# Altium PCB Конвертер USB-RS232 v1.0.PcbDoc
Units mm, origin at the board's own origin, x right, y up, seen from the top; angles counter-clockwise.
Board outline 31.5 x 22 mm, 2 copper layers (Top Layer, Bottom Layer), stack 1.571 mm thick; 26 components, 22 nets, 123 pads, 83 vias.
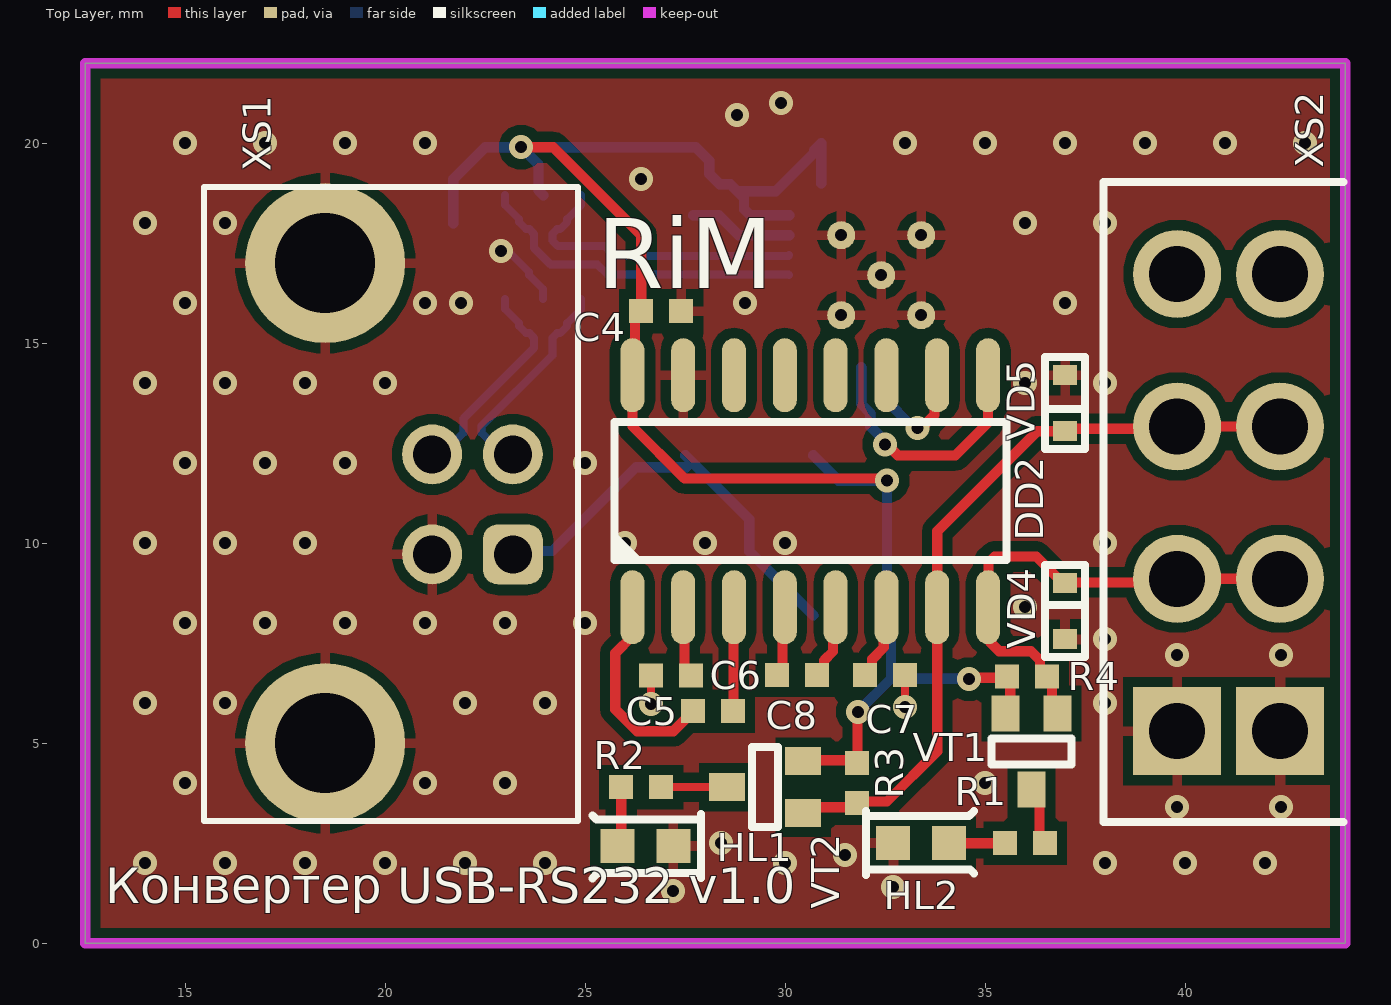
[diagram p0: Top Layer view]
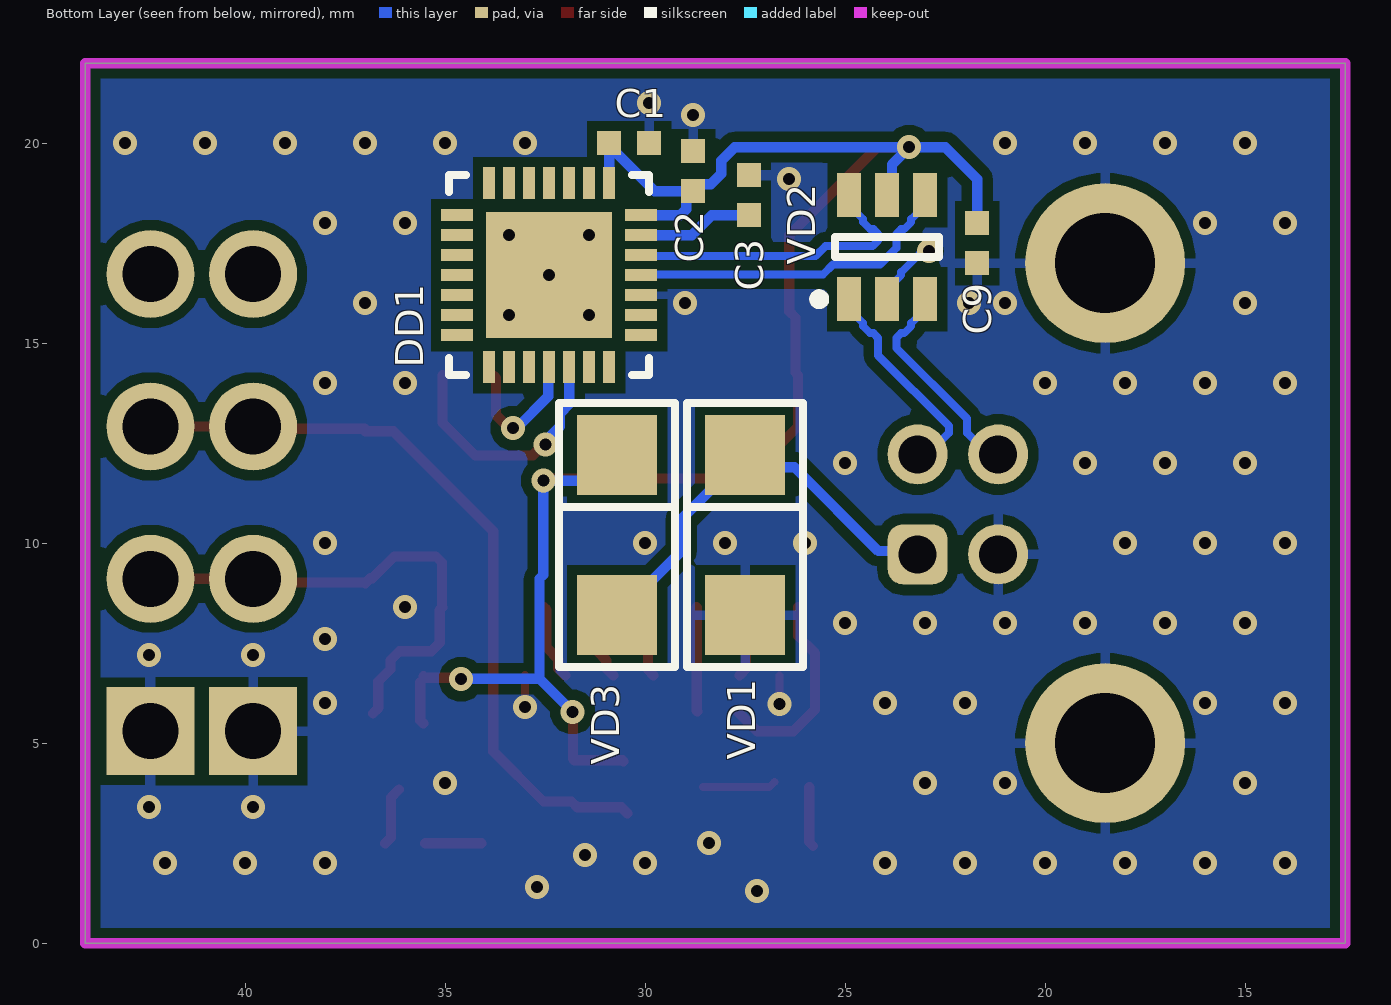
[diagram p1: Bottom Layer view, seen from below]
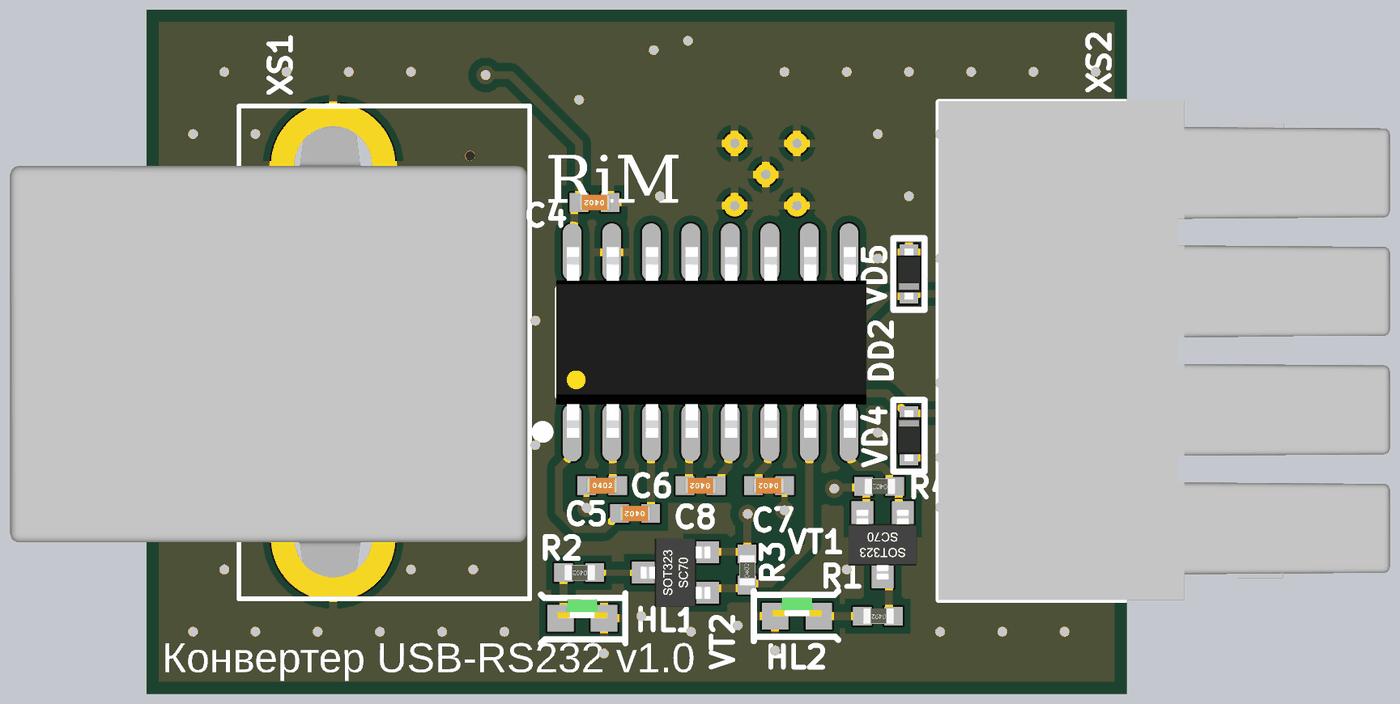
[diagram p2: 3D render of the assembled board from above, using the file's embedded part models]
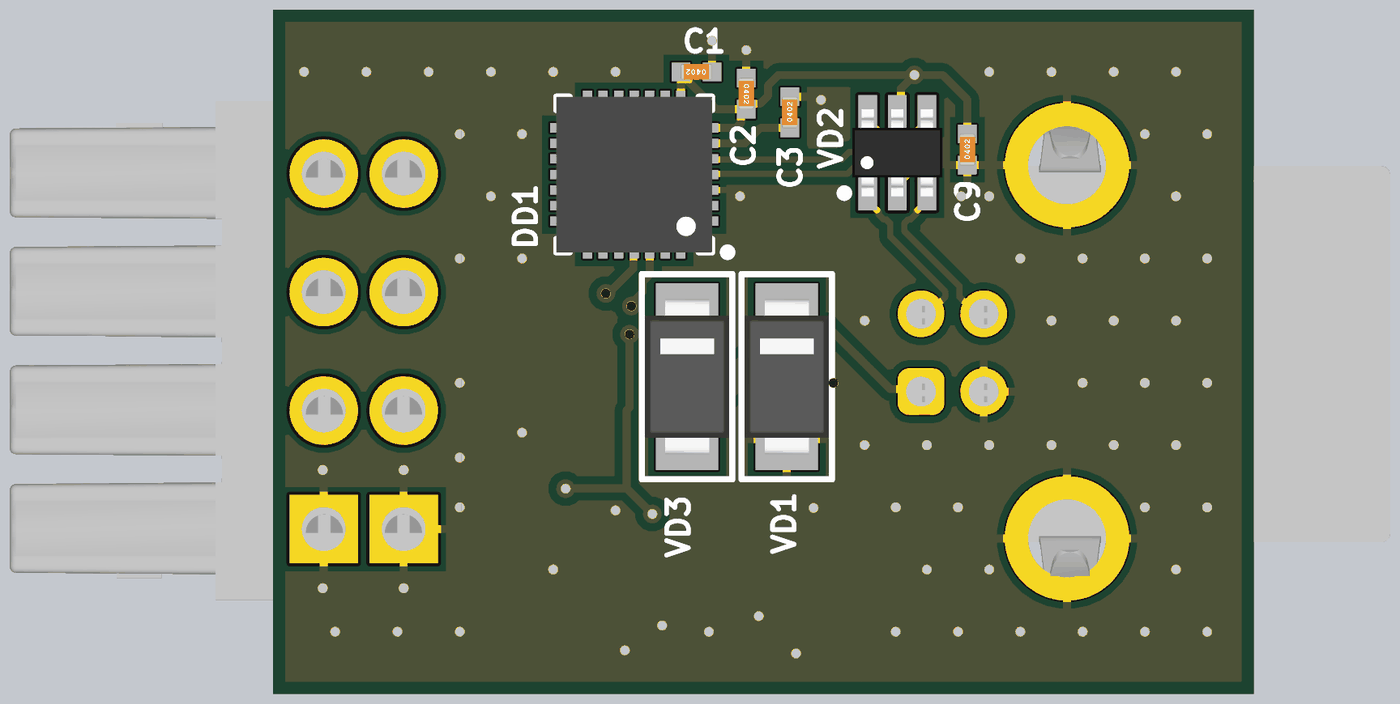
[diagram p3: 3D render of the assembled board from below, using the file's embedded part models]

## Layer stack, top to bottom
Top Solder: solder mask 0.0102, Solder Resist, Dk 3.5
Top Layer: signal copper 0.0356
Dielectric 1: dielectric 1.5, FR-4, Dk 4.8
Bottom Layer: signal copper 0.0356
Bottom Solder: solder mask 0.0102, Solder Resist, Dk 3.5

## Board outline
12.5,0 44,0 44,22 12.5,22

## Design rules (kind name [scope] priority, off if disabled: settings)
Clearance [All] p1: gap=0.254 ignorepadtopadclearanceinfootprint=FALSE except(0: Arc-Hole Track-Hole SMDPad-Hole THPad-Hole Via-Hole Fill-Hole Poly-Hole Region-Hole Text-Hole; 0.2: Arc-Arc Arc-Track Arc-SMDPad Arc-THPad Track-Track Track-SMDPad Track-THPad SMDPad-SMDPad SMDPad-THPad THPad-THPad)
DiffPairsRouting [All] p1: maxlimit=0.254 minlimit=0.2 mostfreqgap=0.254 toplayer_minwidth=0.2 toplayer_maxwidth=0.381 toplayer_prefwidth=0.381 bottomlayer_minwidth=0.2 bottomlayer_maxwidth=0.381 bottomlayer_prefwidth=0.381 maxuncoupledlength=12.7
HoleSize [All] p1: absolutevalues=TRUE maxlimit=3.5 minlimit=0.025 maxpercent=80.000 minpercent=20.000
MinimumSolderMaskSliver [All] p1: minsoldermaskwidth=0
PolygonConnect [All] p1: thpad.connectstyle=Relief thpad.reliefconductorwidth=0.254 thpad.reliefentries=4 thpad.polygonreliefangle="90 Angle" thpad.airgapwidth=0.254 smdpad.connectstyle=Relief smdpad.reliefconductorwidth=0.254 smdpad.reliefentries=4 smdpad.polygonreliefangle="90 Angle" smdpad.airgapwidth=0.254 via.connectstyle=Direct via.reliefconductorwidth=0.254 via.reliefentries=4 via.polygonreliefangle="90 Angle" via.airgapwidth=0.254
RoutingVias [All] p1: holewidth=0.711 width=1.27 viastyle="Through Hole" minholewidth=0.3 minwidth=0.6 maxholewidth=0.711 maxwidth=1.27
SilkToSilkClearance [All] p1: silktosilkclearance=0
SilkToSolderMaskClearance [IsPad] p1: minsilkscreentomaskgap=0 clearancetoexposedcopper=TRUE
SolderMaskExpansion [All] p1: expansion=0.102 istentingtop=FALSE
Width [All] p1: maxlimit=0.254 minlimit=0.182 preferedwidth=0.182 minimp=50.000000 maximp=50.000000 favimp=50.000000
25 further rules are at their usual default settings.

## Classes and differential pairs
differential pair D: +D_P -D_N
differential pair USB_D: +USB_D_P -USB_D_N

## Components (designator, comment, footprint, x,y, rotation, side; value= is the part's Value field where it differs from the comment)
C1 "0,1мк" "CAP: 0402" 30.4,20 r0 bottom
C2 "0,1мк" "CAP: 0402" 28.8,19.3 r270 bottom
C3 "0,1мк" "CAP: 0402" 27.4,18.7 r90 bottom
C4 "0,1мк" "CAP: 0402" 26.9,15.8 r180 top
C5 "0,1мк" "CAP: 0402" 27.14,6.698 r0 top
C6 "0,1мк" "CAP: 0402" 28.2,5.8 r180 top
C7 "0,1мк" "CAP: 0402" 32.5,6.7 r180 top
C8 "0,1мк" "CAP: 0402" 30.3,6.7 r180 top
C9 "0,1мк" "CAP: 0402" 21.7,17.5 r90 bottom
DD1 "CP2102N" "28-QFN (5x5)" 32.4,16.7 r0 bottom
DD2 "SP3232EBEN" 16-SO 30.628,11.325 r90 top
HL1 "LED_single" "LED: 0603G" 26.504,2.432 r0 top
HL2 "LED_single" "LED: 0603G" 33.4,2.5 r180 top
R1 "470" "RES: 0402" 36,2.5 r180 top
R2 "470" "RES: 0402" 26.4,3.9 r180 top
R3 "100к" "RES: 0402" 31.8,4 r90 top
R4 "100к" "RES: 0402" 36.042,6.673 r180 top
VD1 "SMAJ5.0CA" "DIODE: SMA" 27.5,10.2 r90 bottom
VD2 "USBLC6-2SC6" SOT23-6 23.95,17.4 r90 bottom
VD3 "SS34A" "DIODE: SMA" 30.7,10.2 r90 bottom
VD4 "ESDSLC5V0D5B" "DIODE: SOD523" 37,8.3 r90 top
VD5 "ESDSLC5V0D5B" "DIODE: SOD523" 37,13.5 r270 top
VT1 "BSS223PWH6327" SOT-323 36.154,4.796 r270 top
VT2 "BSS223PWH6327" SOT-323 29.5,3.9 r180 top
XS1 "USB mini B" "CON: USB-B-R" 23.975,10.972 r270 top
XS2 "15EDGA-3.81-04P" "CON: 15EDGA-3.81-04P" 42.368,16.73 r270 top

## Footprints (in the part's own frame and the unit in brackets; to place one, negate y for a bottom-side part, rotate by r counter-clockwise, add the part's x,y. Pads: shape width x height; smd on the part's side, far side on the other; paste and mask are expansions set on the pad)
16-SO [mm] "pitch 1.27 mm"
  oval 1.85x0.6 smd mask+0.065: 1(-2.925,4.448) 2(-2.925,3.178) 3(-2.925,1.908) 4(-2.925,0.638) 5(-2.925,-0.632) 6(-2.925,-1.902) 7(-2.925,-3.172) 8(-2.925,-4.442) 9(2.875,-4.442) 10(2.875,-3.172) 11(2.875,-1.902) 12(2.875,-0.632) 13(2.875,0.638) 14(2.875,1.908) 15(2.875,3.178) 16(2.875,4.448)
  round 0.7 on Mech1: 25(-2.5,4.3)
  round 0.7 on Top Overlay: ""(-2.9,5.4)
  silkscreen extent -1.75,-4.9 1.7,4.9, body extent -3.09,-5.01 3.04,4.96, height 1.73
"28-QFN (5x5)" [mm] "5x5 mm, pitch 0.5 mm, power pad"
  round 0.7 hole 0.3 mask+0.065: 0(-1,-1) 0(-1,1) 0(0,0) 0(1,-1) 0(1,1)
  rect 3.15x3.15 smd mask+0.065: 0(0,0)
  rect 0.8x0.3 smd mask+0.065: 1(-2.3,1.5) 2(-2.3,1) 3(-2.3,0.5) 4(-2.3,0) 5(-2.3,-0.5) 6(-2.3,-1) 7(-2.3,-1.5) 15(2.3,-1.5) 16(2.3,-1) 17(2.3,-0.5) 18(2.3,0) 19(2.3,0.5) 20(2.3,1) 21(2.3,1.5)
  rect 0.3x0.8 smd mask+0.065: 8(-1.5,-2.3) 9(-1,-2.3) 10(-0.5,-2.3) 11(0,-2.3) 12(0.5,-2.3) 13(1,-2.3) 14(1.5,-2.3) 22(1.5,2.3) 23(1,2.3) 24(0.5,2.3) 25(0,2.3) 26(-0.5,2.3) 27(-1,2.3) 28(-1.5,2.3)
  round 0.5 on Bottom Overlay: ""(-3,2.5)
  round 0.5 on Mech1: ""(-2,2)
  silkscreen extent -2.5,-2.5 2.5,2.5, body extent -2.5,-2.5 2.5,2.5, height 0.9
"CAP: 0402" [mm]
  rect 0.6x0.6 smd mask+0.065: 1(-0.5,0) 2(0.5,0)
  body extent -0.51,-0.25 0.51,0.25, height 0.51
"CON: 15EDGA-3.81-04P" [mm]
  rect 2.2x2.2 hole 1.4 mask+0.1: 1(11.43,-2.568) 1(11.43,0)
  round 2.2 hole 1.4 mask+0.1: 2(7.62,-2.568) 2(7.62,0) 3(3.81,0) 3(3.81,-2.568) 4(0,0) 4(0,-2.568)
  silkscreen extent -2.29,-4.41 13.71,1.59, body extent -2.32,-4.42 13.71,10.08, height 7
"CON: USB-B-R" [mm]
  rrect50% 1.5x1.5 hole 0.95 mask+0.05: 1(1.25,-0.787)
  round 1.5 hole 0.95 mask+0.05: 2(-1.25,-0.787) 3(-1.25,-2.8) 4(1.25,-2.8)
  round 4 hole 2.5 mask+0.05: 5(-6.028,-5.475) 5(5.972,-5.475)
  silkscreen extent -7.93,-8.5 7.92,0.84, body extent -7.4,-15.85 7.5,0.75, height 11.25
"DIODE: SMA" [mm]
  rect 2x2 smd mask+0.065: 1(-2,0) 2(2,0)
  round 0.5 on Mech1: ""(2,0.9)
  silkscreen extent -3.3,-1.45 3.3,1.45, body extent -2.5,-1.35 2.5,1.35, height 2.28
"DIODE: SOD523" [mm]
  rect 0.5x0.6 smd mask+0.065: 1(-0.7,0) 2(0.7,0)
  silkscreen extent -1.15,-0.5 1.15,0.5, body extent -0.82,-0.4 0.83,0.4, height 0.65
"LED: 0603G" [mm]
  rect 0.85x0.85 smd mask+0.068: 1(-0.7,0) 2(0.7,0)
  silkscreen extent -1.33,-0.81 1.39,0.8, body extent -0.8,0 0.8,0.6, height 0.75
"RES: 0402" [mm]
  rect 0.6x0.6 smd mask+0.065: 1(-0.5,0) 2(0.5,0)
  body extent -0.52,-0.25 0.47,0.25, height 0.34
SOT23-6 [mm] "pitch 0.95 mm"
  rect 1.1x0.6 smd: 1(-1.3,0.95) 2(-1.3,0) 3(-1.3,-0.95) 4(1.3,-0.95) 5(1.3,0) 6(1.3,0.95)
  round 0.5 on Mech1: ""(-1,1.1)
  silkscreen extent -1.42,-1.3 0.25,1.83, body extent -1.4,-1.45 1.4,1.45, height 1.45
SOT-323 [mm]
  rect 0.9x0.7 smd mask+0.065: 1(-0.95,0.65) 2(-0.95,-0.65) 3(0.95,0)
  round 0.5 on Mech1: ""(-0.7,0.7)
  silkscreen extent -0.33,-1 0.33,1, body extent -1.12,-1.1 1.12,1.1, height 1.1

## Part data
C1 C2 C3 C4 C5 C6 C7 C8 C9: library part Ceramic_0402, Наименование="0402 X7R 25В 0,1 мкФ ±10%", Примечание=SMD
DD1: "USB2.0-to-UART", Наименование=CP2102N, Примечание=SMD
DD2: library part SP3232EB, "RS-232", Наименование=SP3232EBEN, Примечание=SMD
R1 R2 R3 R4: library part Resistor_0402, Примечание=SMD
  R1 R2: Наименование="0402 470 Ом ±1%"
  R3 R4: Наименование="0402 100 кОм ±1%"
VD1 VD4 VD5: library part TVS_single, Примечание=SMD
  VD1: Наименование=SMAJ5.0CA
  VD4 VD5: Наименование=ESDSLC5V0D5B
VD3: library part Schottky_single, Наименование=SS34A, Примечание=SMD
VT1 VT2: library part MOSFET_P_132, Наименование=BSS223PWH6327, Примечание=SMD
XS1: library part USB_B, Manufacturer=Molex, PartNumber=0675031020, CommentText="\"USB\"", HelpURL=https://www.digikey.com/product-detail/en/molex/0675031020/WM5461CT-ND/1624427, TypeConnector="USB mini B", ValueManufacturerPartNumber="USB mini B", Наименование=USB-B
HL1 HL2: Наименование=FYLS-0603UGC, Примечание=SMD
VD2: Наименование=USBLC6-2SC6, Примечание=SMD
XS2: Наименование=15EDGA-3.81-04P

## Via types
v1: diameter 0.6, hole 0.3, Top Layer to Bottom Layer, tented both sides, 83 vias

## Nets (pads, with @x,y where several pads share a name; then routed paths per layer and width w, separated by ;. In a path a pad name is that pad's centre, name@x,y a point inside that pad or via, vN(x,y) a via of type N, cw(c..) or ccw(c..) an arc to the next point about the centre after c; other vN are vias at no path point)
D_N: DD1.5 VD2.6 | length 7.6
  Bottom Layer w0.2: VD2.6 24.9,18.45 24.55,18.1 24.55,18.026 24.374,17.85 24.294,17.85 24.177,17.733 24.177,17.567 24.318,17.426 25.491,17.426 25.739,17.177 30.077,17.177 DD1.5
D_P: DD1.4 VD2.4 | length 8.3
  Bottom Layer w0.2: VD2.4 23,18.45 23.35,18.1 23.35,18.026 23.526,17.85 23.606,17.85 23.723,17.733 23.723,17.379 24.13,16.972 25.303,16.972 25.551,16.723 30.077,16.723 DD1.4
GND_RS1: C1.1 C2.1 C3.2 C4.1 C5.1 C7.1 C9.1 DD1.0 DD1.3 DD2.15 HL1.2 HL2.2 VD1.1 VD2.2 VD4.1 VD5.1 XS1.4 XS1.5 XS2.1 | length 3.3
  Top Layer w0.2: v1(26.64,5.981) C5.1 ; v1(33,5.9) C7.1
  Bottom Layer w0.2: v1(22.9,17.3) 22.977,17.223 23.151,17.223 23.6,16.774 23.6,16.7 23.95,16.35 VD2.2
  other v1: 27.2,1.3 32.7,1.4 14,2 16,2 18,2 20,2 22,2 24,2 30,2 38,2 40,2 42,2 31.5,2.2 28.4,2.5 39.8,3.4 42.4,3.4 15,4 21,4 23,4 35,4 14,6 16,6 22,6 24,6 38,6 39.8,7.2 42.4,7.2 38,7.6 15,8 17,8 19,8 21,8 23,8 25,8 36,8.4 14,10 16,10 18,10 26,10 28,10 30,10 38,10 15,12 17,12 19,12 25,12 14,14 16,14 18,14 20,14 36,14 38,14 15,16 21,16 21.9,16 29,16 37,16 14,18 16,18 36,18 38,18 26.4,19.1 15,20 17,20 19,20 21,20 33,20 35,20 37,20 39,20 41,20 43,20 28.8,20.7 29.9,21
NetC3_1: C3.1 DD1.6 | length 2.6
  Bottom Layer w0.254: 27.7,18.2 28.338,18.2 28.838,17.7 DD1.6
NetC5_2: C5.2 DD2.2 | length 1.8
  Top Layer w0.254: DD2.2 27.481,8.369 27.481,6.857 C5.2
NetC6_1: C6.1 DD2.3 | length 2.6
  Top Layer w0.254: C6.1 28.71,5.81 28.71,8.39 DD2.3
NetC6_2: C6.2 DD2.1 | length 5.1
  Top Layer w0.254: DD2.1 26.18,7.681 25.752,7.253 25.752,5.848 26.3,5.3 27.2,5.3 C6.2
NetC7_2: C7.2 DD2.6 | length 1.9
  Top Layer w0.254: C7.2 32.173,6.873 32.173,7.102 32.464,7.393 32.464,8.333 DD2.6
NetC8_1: C8.1 DD2.5 | length 1.9
  Top Layer w0.254: C8.1 30.973,6.873 30.973,7.072 31.194,7.292 31.194,8.334 DD2.5
NetC8_2: C8.2 DD2.4 | length 1.8
  Top Layer w0.254: C8.2 29.932,6.832 29.932,8.342 DD2.4
NetHL1_1: HL1.1 R2.2 | length 1.5
  Top Layer w0.254: HL1.1 25.9,2.529 R2.2
NetHL2_1: HL2.1 R1.2 | length 1.4
  Top Layer w0.254: HL2.1 R1.2
NetR1_1: R1.1 VT1.3 | length 1.5
  Top Layer w0.254: VT1.3 36.353,3.647 36.353,2.647 R1.1
NetR2_1: R2.1 VT2.3 | length 1.8
  Top Layer w0.2: R2.1@26.764,4.036 R2.1 VT2.3
NetVD1_2: VD1.2 VD3.1 XS1.1 | length 10.8
  Bottom Layer w0.254: XS1.1 23.269,9.802 24.171,9.802 26.268,11.9 27.532,11.9 VD1.2@27.666,12.034 ; VD1.2 VD1.2@27.666,12.034 ; VD3.1 29.1,9.8 29.1,10.6 VD1.2@27.666,12.034
RS232_RXD: DD2.8 R4.1 VD4.2 VT1.1 XS2.2 | length 12.6
  Top Layer w0.254: DD2.8 35.136,8.334 35.136,7.511 35.348,7.3 36.142,7.3 36.369,7.074 36.369,6.846 R4.1 36.673,6.541 36.673,5.877 VT1.1 ; DD2.8@35.081,8.411 35.081,9.518 35.23,9.667 36.277,9.667 36.821,9.123 36.877,9.123 VD4.2 37.021,9.021 39.711,9.021 39.8,9.11 XS2.2@42.368,9.11
RS232_TXD: DD2.7 R3.1 VD5.2 VT2.1 XS2.3 | length 19.1
  Top Layer w0.254: VT2.1 30.6,3.4 31.7,3.4 31.843,3.543 32.543,3.543 33.8,4.8 DD2.7 33.8,10.3 36.3,12.8 VD5.2 ; VD5.2@37.01,12.86 39.74,12.86 39.8,12.92 XS2.3@42.368,12.92
RX: DD1.25 DD2.10 | length 3.5
  Top Layer w0.254: v1(33.309,12.876) 33.4,12.876 33.734,13.21 33.734,14.134 DD2.10@33.79,14.19
  Bottom Layer w0.254: DD1.25 32.423,14.377 32.423,13.673 33.22,12.876 v1(33.309,12.876)
TX: DD1.26 DD2.9 | length 6.4
  Top Layer w0.254: v1(32.489,12.471) 32.535,12.471 32.811,12.195 34.255,12.195 35.07,13.01 DD2.9
  Bottom Layer w0.254: DD1.26 31.9,13.48 32.128,13.252 32.128,12.926 32.489,12.564 v1(32.489,12.471)
USB_D_N: VD2.1 XS1.2 | length 5.4
  Bottom Layer w0.2: XS1.2 22.949,12.222 22.409,12.761 22.409,12.927 24.177,14.695 24.177,15.133 24.294,15.25 24.374,15.25 24.55,15.426 24.55,15.5 24.9,15.85 VD2.1
USB_D_P: VD2.3 XS1.3 | length 5.4
  Bottom Layer w0.2: XS1.3 21.415,12.222 21.955,12.761 21.955,13.115 23.723,14.883 23.723,15.133 23.606,15.25 23.526,15.25 23.35,15.426 23.35,15.5 23,15.85 VD2.3
USB_PWR: C1.2 C2.2 C4.2 C9.2 DD1.7 DD1.8 DD2.16 R3.2 R4.2 VD2.5 VD3.2 VT1.2 VT2.2 | length 46.5
  Top Layer w0.254: v1(23.4,19.9) 24.2,19.9 26.4,17.7 C4.2 26.244,15.644 26.244,14.264 DD2.16 26.18,12.92 27.479,11.621 32.49,11.621 v1(32.548,11.563) ; VT2.2@30.55,4.55 30.575,4.575 31.775,4.575 31.808,4.608 31.808,5.776 v1(31.817,5.785) ; v1(34.6,6.6) 34.636,6.636 35.505,6.636 R4.2 ; VT1.2@35.55,5.5 35.625,5.575 R4.2@35.625,6.525
  Bottom Layer w0.254: C9.2 21.7,19.1 22.5,19.9 v1(23.4,19.9) ; VD2.5 23.835,18.815 23.835,19.465 v1(23.4,19.9) ; DD1.7 29.122,18.2 28.973,18.349 28.973,18.627 C2.2 ; VD3.2 31.337,11.563 v1(32.548,11.563) ; DD1.8 C1.2 30.727,19.827 30.727,19.765 29.762,18.8 C2.2 ; v1(31.817,5.785) 32.643,6.611 ; v1@32.569,11.621 32.548,11.599 32.548,9.213 32.643,9.118 32.643,6.611 ; v1(34.6,6.6) 34.589,6.611 32.643,6.611 ; v1(23.4,19.9) 27.762,19.9 28.1,19.562 28.1,19.236 28.363,18.973 28.627,18.973 C2.2
pads on no net: DD1. DD1.1 DD1.2 DD1.9 DD1.10 DD1.11 DD1.12 DD1.13 DD1.14 DD1.15 DD1.16 DD1.17 DD1.18 DD1.19 DD1.20 DD1.21 DD1.22 DD1.23 DD1.24 DD1.27 DD1.28 DD2. DD2.11 DD2.12 DD2.13 DD2.14 DD2.25 VD1. VD2. VD3. VT1. VT2. XS2.4

## Polygon pours and split planes (outlines as drawn)
GND_RS1 on Bottom Layer "GND_RS1_L02_P000" (solid, pour order 0): 12.5,22 44,22 44,0 12.5,0
GND_RS1 on Top Layer "GND_RS1_L01_P001" (solid, remove dead copper, pour order 1): 12.5,22 44,22 44,0 12.5,0

## Keep-outs
Keep-Out Layer:
  the board outline again, w0.254

## Silkscreen, mask and mechanical layers (free items; w line width, h text height)
Top Overlay:
  text "RiM" at 25.3,15.8 h3
  text "Конвертер USB-RS232 v1.0" at 13,0.7 h1.52